# Altium PCB CM5IO.PcbDoc (part 2 of 4)
Units mm, origin at the board's own origin, x right, y up, seen from the top; angles counter-clockwise.
Board outline 160 x 90 mm, 4 copper layers (F.Cu, In1.Cu, In2.Cu, B.Cu); 76 components, 212 nets, 672 pads, 703 vias.
Unrouted connection lines stored in the file: 4.
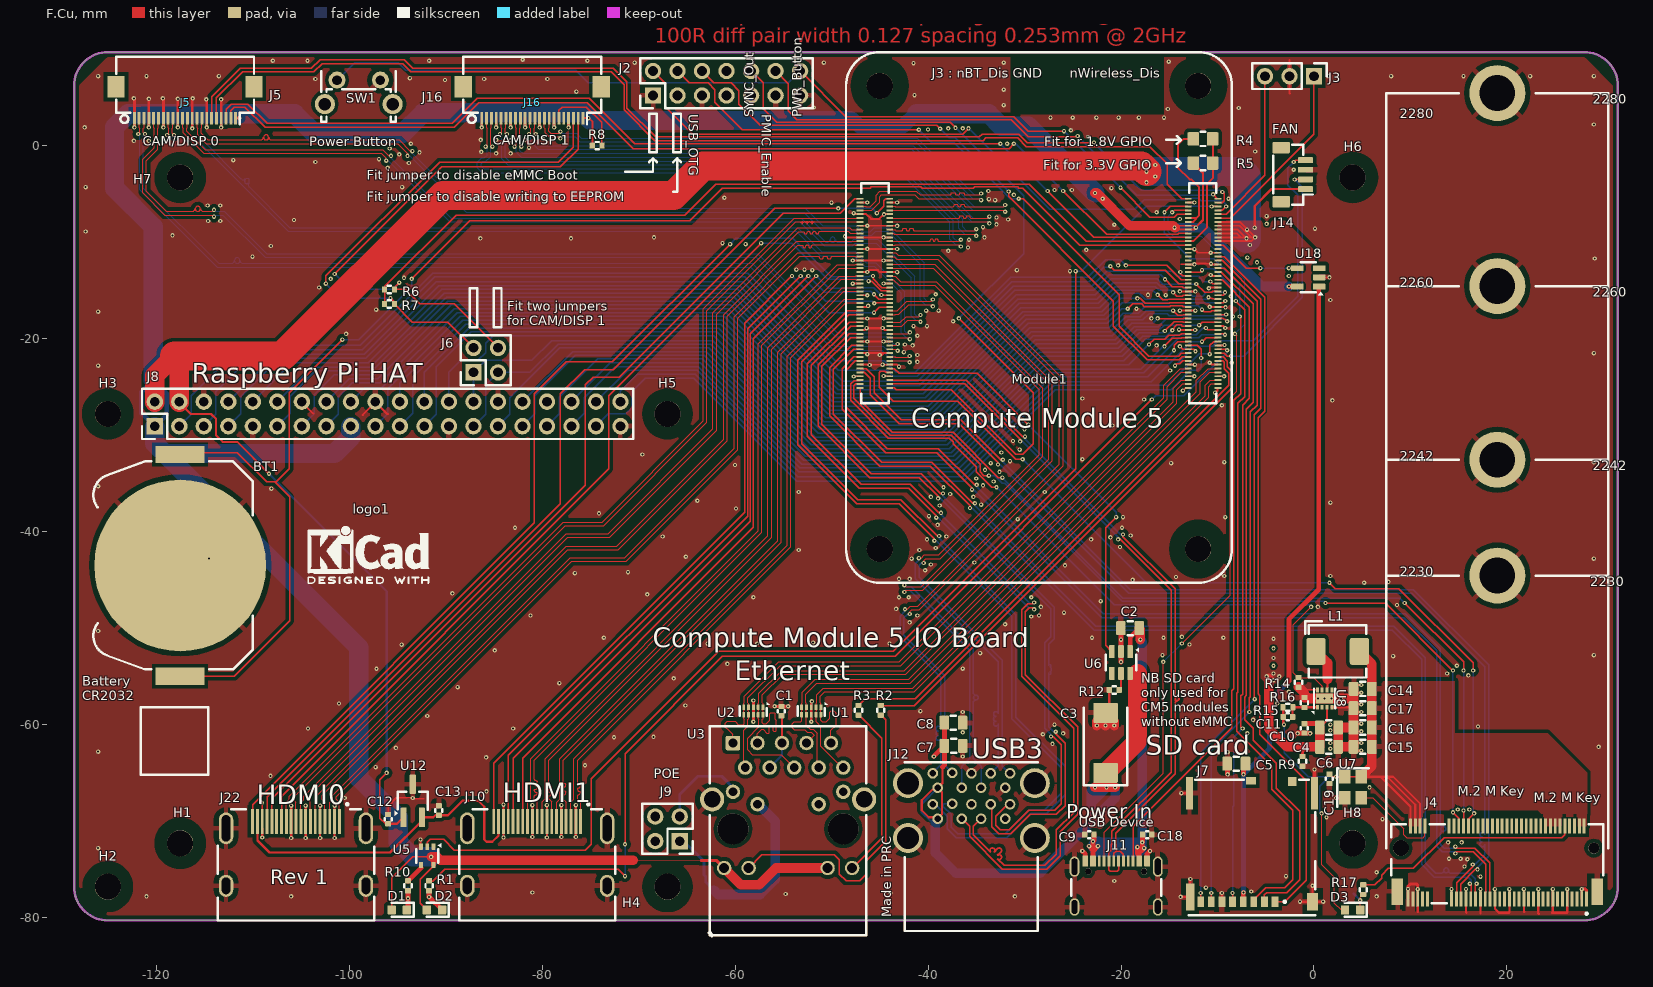
[diagram p0: F.Cu view]

## Via types
v1: diameter 0.45, hole 0.2, F.Cu to B.Cu, tented both sides, 703 vias

## Nets (pads, with @x,y where several pads share a name; then routed paths per layer and width w, separated by ;. In a path a pad name is that pad's centre, name@x,y a point inside that pad or via, vN(x,y) a via of type N, cw(c..) or ccw(c..) an arc to the next point about the centre after c; other vN are vias at no path point) (continued)
DPHY0_D0_P: (continued)
  B.Cu w0.127: v1(-121.15,1.2) -121.31,1.04 -121.31,-4.421 -113.521,-12.21 -113.49,-12.21 -112.188,-12.21 ccw(c-112.188,-11.916) -111.894,-11.916 ccw(c-111.6,-11.916) -111.6,-11.622 -111.588,-11.622 ccw(c-111.588,-11.916) -111.294,-11.916 ccw(c-111,-11.916) -111,-12.21 -58.221,-12.21 -49.621,-20.81 -46.639,-20.81 -46.631,-20.802 -45.969,-20.802 -45.961,-20.81 -44.621,-20.81 -43.521,-21.91 -42.01,-21.91 v1(-41.9,-21.8)
DPHY0_D1_N: J5.5 Module1.121 | length 94.6
  F.Cu w0.127: J5.5@-120.25,2.85 -120.25,1.875 -120.19,1.815 -120.19,-0.221 -121.39,-1.421 -121.39,-4.879 -119.079,-7.19 -114.16,-7.19 v1(-114,-7.35) ; Module1.121@-43.96,-21.1 -43.435,-21.1 -43.425,-21.09 -43.316,-21.09 v1(-43.155,-21.251)
  B.Cu w0.127: v1(-114,-7.35) -113.84,-7.19 -113.079,-7.19 -108.679,-11.59 -57.779,-11.59 -49.579,-19.79 -44.279,-19.79 -44.09,-19.979 -44.09,-20.579 -43.579,-21.09 -43.316,-21.09 v1(-43.155,-21.251)
DPHY0_D1_P: J5.6 Module1.123 | length 96.4
  F.Cu w0.127: J5.6@-119.75,2.85 -119.75,1.875 -119.81,1.815 -119.81,-0.379 -121.01,-1.579 -121.01,-4.721 -118.921,-6.81 -116.3,-6.81 -116.251,-6.81 ccw(c-116.251,-6.534) -115.976,-6.534 ccw(c-115.7,-6.534) -115.7,-6.259 -115.651,-6.259 ccw(c-115.651,-6.534) -115.376,-6.534 ccw(c-115.1,-6.534) -115.1,-6.81 -114.16,-6.81 v1(-114,-6.65) ; Module1.123@-43.96,-20.7 -43.435,-20.7 -43.425,-20.71 -43.316,-20.71 v1(-43.155,-20.548)
  B.Cu w0.127: v1(-114,-6.65) -113.84,-6.81 -112.921,-6.81 -108.521,-11.21 -57.621,-11.21 -49.421,-19.41 -44.121,-19.41 -43.71,-19.821 -43.71,-20.421 -43.421,-20.71 -43.316,-20.71 v1(-43.155,-20.548)
DPHY0_D2_N: J5.11 Module1.133 | length 92.2
  F.Cu w0.127: J5.11@-117.25,2.85 -117.25,1.875 -117.19,1.815 -117.19,1.321 -115.079,-0.79 -96.679,-0.79 -96.149,-1.32 v1(-96.149,-1.549) ; Module1.133@-43.92,-18.7 -43.395,-18.7 -43.385,-18.69 -42.721,-18.69 -42.121,-18.09 -40.943,-18.09 v1(-40.781,-18.252)
  B.Cu w0.127: v1(-96.149,-1.549) -95.92,-1.549 -89.579,-7.89 -53.279,-7.89 -50.779,-10.39 -47.821,-10.39 -47.521,-10.09 -45.379,-10.09 -41.757,-13.711 -41.757,-17.611 -41.279,-18.09 -40.943,-18.09 v1(-40.781,-18.252)
DPHY0_D2_P: J5.12 Module1.135 | length 93.9
  F.Cu w0.127: J5.12@-116.75,2.85 -116.75,1.875 -116.81,1.815 -116.81,1.479 -114.921,-0.41 -96.521,-0.41 -95.88,-1.051 v1(-95.651,-1.051) ; Module1.135@-43.92,-18.3 -43.395,-18.3 -43.385,-18.31 -42.879,-18.31 -42.279,-17.71 -40.943,-17.71 v1(-40.781,-17.548)
  B.Cu w0.127: v1(-95.651,-1.051) -95.651,-1.28 -89.421,-7.51 -53.121,-7.51 -50.621,-10.01 -50.5,-10.01 -50.452,-10.01 ccw(c-50.452,-9.734) -50.176,-9.734 ccw(c-49.9,-9.734) -49.9,-9.458 -49.852,-9.458 ccw(c-49.852,-9.734) -49.576,-9.734 ccw(c-49.3,-9.734) -49.3,-10.01 -47.979,-10.01 -47.679,-9.71 -45.221,-9.71 -41.377,-13.554 -41.377,-17.454 -41.121,-17.71 -40.943,-17.71 v1(-40.781,-17.548)
DPHY0_D3_N: J5.14 Module1.139 | length 92.8
  F.Cu w0.127: J5.14@-115.75,2.85 -115.75,1.875 -115.69,1.815 -115.69,1.121 -114.779,0.21 -94.979,0.21 -93.936,-0.833 v1(-93.936,-1.061) ; Module1.139@-43.92,-17.5 -43.395,-17.5 -43.385,-17.49 -43.021,-17.49 -42.021,-16.49 -39.661,-16.49 v1(-39.5,-16.651)
  B.Cu w0.127: v1(-93.936,-1.061) -93.708,-1.061 -87.879,-6.89 -52.879,-6.89 -51.079,-8.69 -47.579,-8.69 -46.979,-9.29 -45.821,-9.29 -45.421,-8.89 -44.179,-8.89 -40.79,-12.279 -40.79,-15.979 -40.279,-16.49 -39.661,-16.49 v1(-39.5,-16.651)
DPHY0_D3_P: J5.15 Module1.141 | length 94.6
  F.Cu w0.127: J5.15@-115.25,2.85 -115.25,1.875 -115.31,1.815 -115.31,1.279 -114.621,0.59 -109.176,0.59 ccw(c-109.176,0.866) -108.9,0.866 ccw(c-108.624,0.866) -108.624,1.141 -108.576,1.141 ccw(c-108.576,0.866) -108.3,0.866 ccw(c-108.024,0.866) -108.024,0.59 -94.821,0.59 -93.667,-0.564 v1(-93.439,-0.564) ; Module1.141@-43.92,-17.1 -43.395,-17.1 -43.385,-17.11 -43.179,-17.11 -42.179,-16.11 -39.661,-16.11 v1(-39.5,-15.948)
  B.Cu w0.127: v1(-93.439,-0.564) -93.439,-0.792 -87.721,-6.51 -52.721,-6.51 -50.921,-8.31 -47.421,-8.31 -46.821,-8.91 -45.979,-8.91 -45.579,-8.51 -44.021,-8.51 -40.41,-12.121 -40.41,-15.821 -40.121,-16.11 -39.661,-16.11 v1(-39.5,-15.948)
DPHY1_C_N: J16.8 Module1.187 | length 66.1
  F.Cu w0.127: v1(-82.85,-0.1) -82.69,0.06 -82.69,1.815 -82.75,1.875 J16.8@-82.75,2.85 ; Module1.187@-43.92,-7.9 -43.395,-7.9 -43.385,-7.89 -33.81,-7.89 v1(-33.65,-8.05)
  B.Cu w0.127: v1(-82.85,-0.1) -82.69,-0.26 -82.69,-0.679 -82.179,-1.19 -42.179,-1.19 -35.479,-7.89 -33.81,-7.89 v1(-33.65,-8.05)

## Text inside footprints (layer, text, board x,y; h text height)
J4: F.SilkS "2260" at 8.9,-14.65 h1; F.SilkS "2280" at 8.9,2.85 h1; F.SilkS "2242" at 28.9,-33.65 h1; F.SilkS "M.2 M Key" at 22.8,-68.067 h1; F.SilkS "2260" at 28.9,-15.65 h1; F.SilkS "2280" at 28.9,4.35 h1; F.SilkS "2242" at 8.9,-32.65 h1; F.SilkS "2230" at 28.65,-45.65 h1; F.SilkS "2230" at 8.9,-44.65 h1
J11: Dwgs.User "PCB Edge" at -22.248,-81.358 h0.5